# Altium PCB Flyback.PcbDoc (part 2 of 2)
Units mm, origin at the board's own origin, x right, y up, seen from the top; angles counter-clockwise.
Board outline 152.4 x 101.6 mm, 2 copper layers (Top Layer, Bottom Layer), stack 1.671 mm thick; 41 components, 28 nets, 118 pads, 0 vias.
Unrouted connection lines stored in the file: 75.
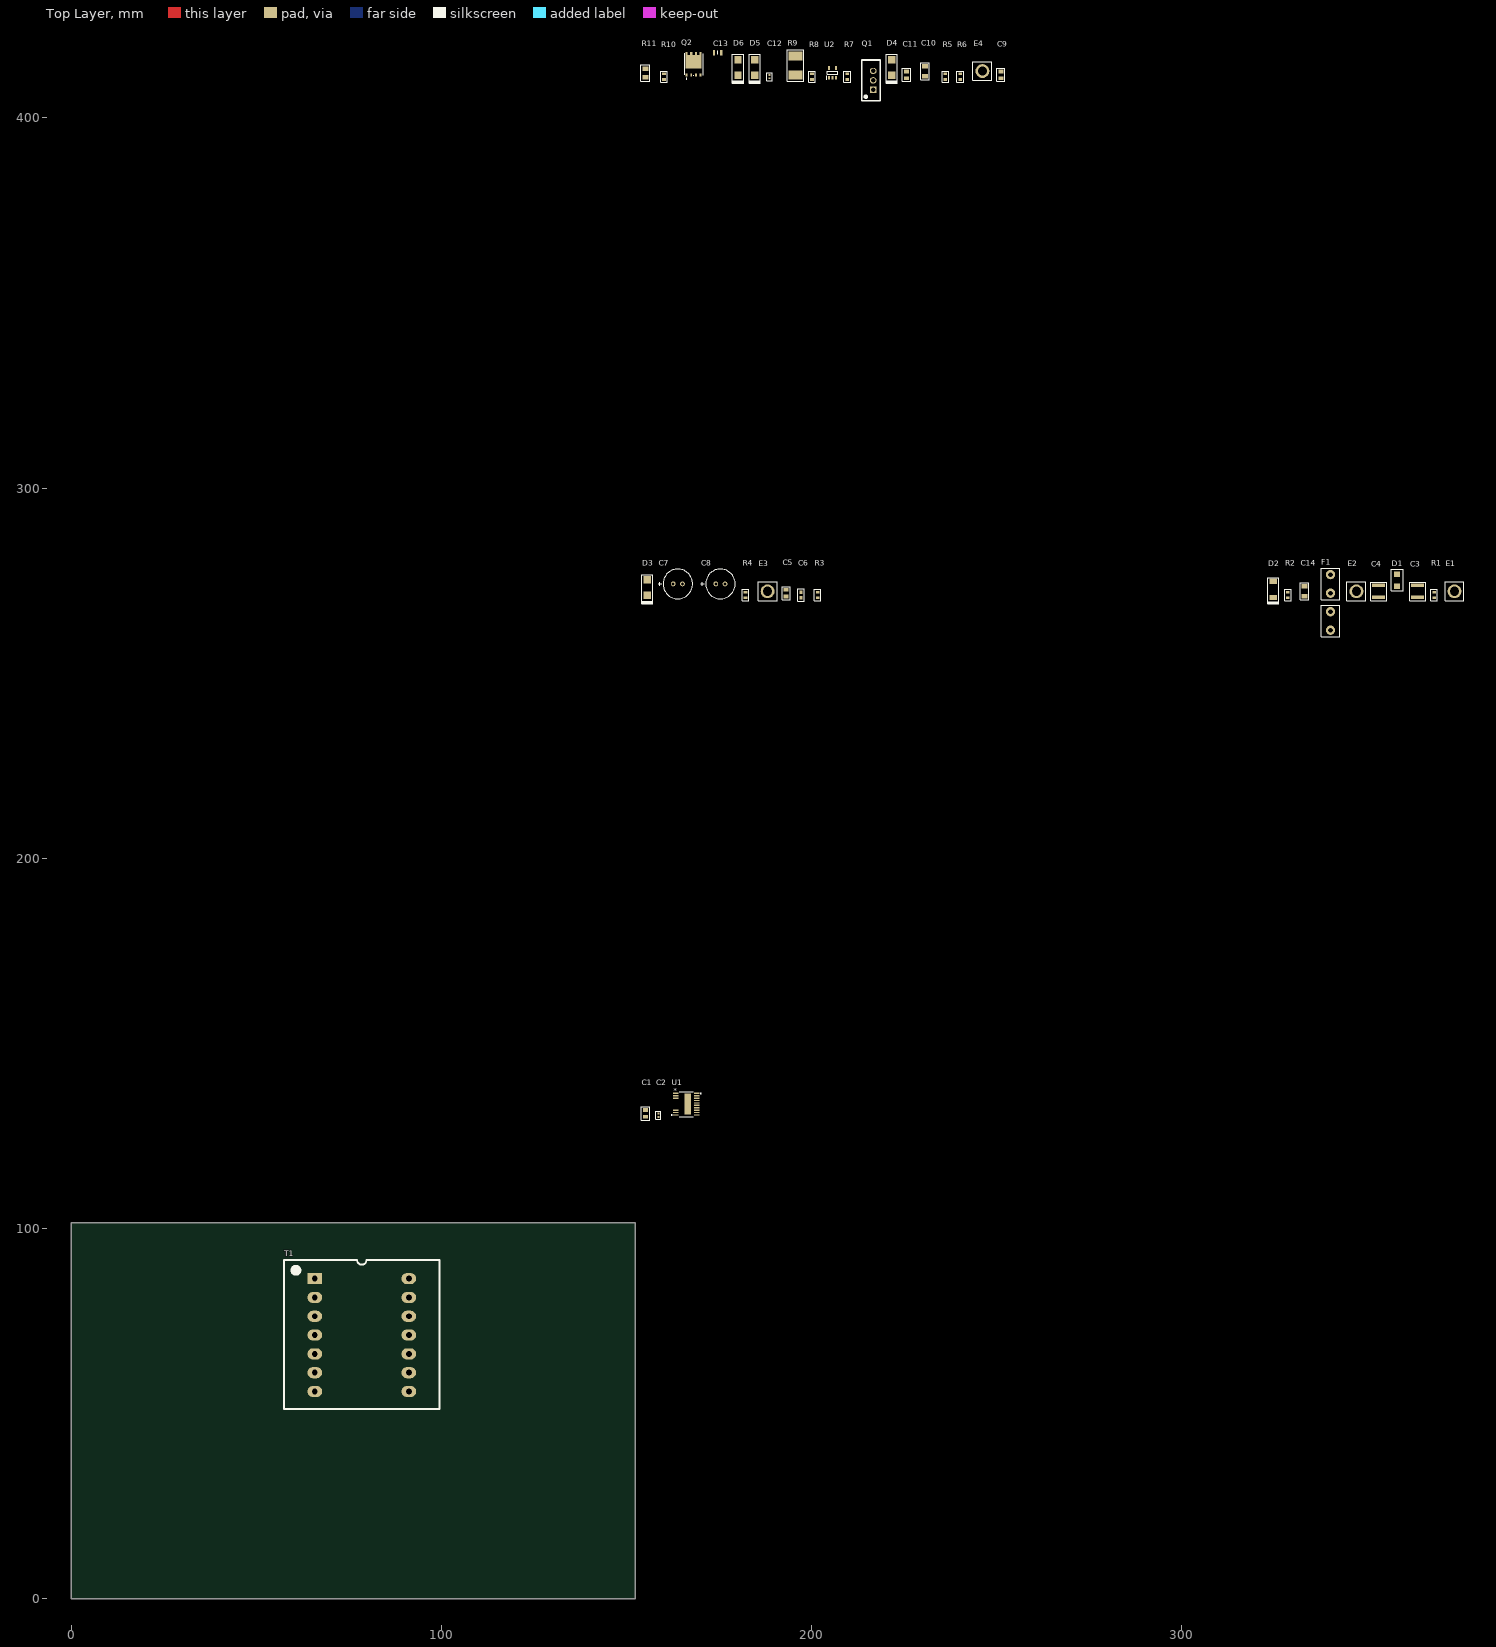
[diagram p0: Top Layer view]

## Part data (continued)
R5: library part R_Tc, "RES SMD 110K OHM 5% 1/10W 0603 / CRCW0603110KJNEA", Case Code (Imperial)=0603, Case Code (Metric)=1608, Manufacturer="Vishay Dale", Manufacturer Part Number=CRCW0603110KJNEA, Max Operating Temperature=155°C, Max Power Dissipation=100mW, Min Operating Temperature=-55°C, Package Quantity=1, Resistance=110kR, Resistor Type="Thick Film", Supplier Part Number 1=541-110KGCT-ND, Temperature Coefficient=200ppm/°C, Tolerance=5%, Voltage Rating=75V, Case/Package=0603, Category=Resistors, ComponentLink1Description=https://datasheet.ciiva.com/3256/dcrcwe3-3256965.pdf?src-supplier=Avnet, ComponentLink1URL=https://datasheet.ciiva.com/3256/dcrcwe3-3256965.pdf?src-supplier=Avnet, ComponentLink2Description=https://datasheet.ciiva.com/5549/dcrcwe3-109170-5549509.pdf?src-supplier=Mouser, ComponentLink2URL=https://datasheet.ciiva.com/5549/dcrcwe3-109170-5549509.pdf?src-supplier=Mouser, ComponentLink3Description=https://datasheet.ciiva.com/2493/dcrcwe3-2493661.pdf?src-supplier=Digi-Key, ComponentLink3URL=https://datasheet.ciiva.com/2493/dcrcwe3-2493661.pdf?src-supplier=Digi-Key, ComponentLink4Description=https://datasheet.ciiva.com/2493/dcrcwe3-2493662.pdf?src-supplier=Digi-Key, ComponentLink4URL=https://datasheet.ciiva.com/2493/dcrcwe3-2493662.pdf?src-supplier=Digi-Key, ComponentLink5Description=https://datasheet.ciiva.com/2493/dcrcwe3-2493663.pdf?src-supplier=Digi-Key, ComponentLink5URL=https://datasheet.ciiva.com/2493/dcrcwe3-2493663.pdf?src-supplier=Digi-Key, Construction=Rectangular, Contact Plating=Tin, Depth=0.85mm, Features="Automotive AEC-Q200", Height=0.02inch, Lead Free="Lead Free", Length=1.55mm, Military Standard=Not, Number of Terminations=2, Packaging="Tape and Reel", Power Rating=100mW, Pricing 1="1=0,10000, 10=0,03200, 100=0,01310, 1000=0,00588, 2500=0,00510 (USD)", Radiation Hardening=No, RoHS=Yes, RoHS Compliant=Yes, Series=CRCW, Stock 1=16475, Supplier 1=Digi-Key, Termination=SMD/SMT, Voltage Rating (DC)=75V, Weight=7.1E-05oz, Width=0.85mm
R6: library part R_FB2, "VISHAY         CRCW06035K36FKEA.             SMD Chip Resistor, Thick Film, 5.36 kohm, 75 V, 0603 [1608 Metric], 100 mW,  1%, CRCW Series", Case Code (Imperial)=0603, Case Code (Metric)=1608, Manufacturer=Vishay, Manufacturer Part Number=CRCW06035K36FKEA, Max Operating Temperature=155°C, Max Power Dissipation=100mW, Min Operating Temperature=-55°C, Package Quantity=5000, Resistance=5.36kR, Resistance Tolerance=1%, Resistor Type="Thick Film", Supplier Part Number 1=541-5.36KHCT-ND, Temperature Coefficient=100ppm/°C, Voltage Rating=75V, Case/Package=0603, Category=Resistors, ComponentLink1Description=https://datasheet.ciiva.com/3257/dcrcwe3-3257765.pdf?src-supplier=Avnet, ComponentLink1URL=https://datasheet.ciiva.com/3257/dcrcwe3-3257765.pdf?src-supplier=Avnet, ComponentLink2Description=https://datasheet.ciiva.com/7679/1697337-7679125.pdf?src-supplier=Element14, ComponentLink2URL=https://datasheet.ciiva.com/7679/1697337-7679125.pdf?src-supplier=Element14, ComponentLink3Description=https://datasheet.ciiva.com/7679/1697337-7679126.pdf?src-supplier=Element14, ComponentLink3URL=https://datasheet.ciiva.com/7679/1697337-7679126.pdf?src-supplier=Element14, ComponentLink4Description=https://datasheet.ciiva.com/16789/70201119-16789112.pdf?src-supplier=Allied+Electronics, ComponentLink4URL=https://datasheet.ciiva.com/16789/70201119-16789112.pdf?src-supplier=Allied+Electronics, ComponentLink5Description=https://datasheet.ciiva.com/7792/125364-7792346.pdf?src-supplier=Element14, ComponentLink5URL=https://datasheet.ciiva.com/7792/125364-7792346.pdf?src-supplier=Element14, ComponentLink6Description=https://datasheet.ciiva.com/22707/1697337-22707754.pdf?src-supplier=Element14, ComponentLink6URL=https://datasheet.ciiva.com/22707/1697337-22707754.pdf?src-supplier=Element14, ComponentLink7Description=https://datasheet.ciiva.com/5541/dcrcwe3-109170-5541375.pdf?src-supplier=Mouser, ComponentLink7URL=https://datasheet.ciiva.com/5541/dcrcwe3-109170-5541375.pdf?src-supplier=Mouser, Construction=Rectangular, Contact Plating=Tin, Depth=0.85mm, Features="Automotive AEC-Q200", Height=0.45mm, Lead Free="Lead Free", Length=1.55mm, Military Standard=Not, Number of Pins=2, Number of Terminations=2, Packaging="Tape and Reel", Power Rating=100mW, Pricing 1="1=0,10000, 10=0,03600, 100=0,01450, 1000=0,00652, 2500=0,00566 (USD)", Radiation Hardening=No, REACH SVHC="No SVHC", RoHS=Yes, RoHS Compliant=Yes, Series=CRCW, Size Code=0603, Stock 1=42, Supplier 1=Digi-Key, Technology="THICK FILM", Termination=SMD/SMT, Tolerance=1%, Voltage Rating (DC)=75V, Weight=7.1E-05oz, Width=0.85mm
R7: library part R_Gate2, "RES SMD 4.7 OHM 5% 1/10W 0603", Case Code (Imperial)=0603, Case Code (Metric)=1608, Manufacturer="Stackpole Electronics", Manufacturer Part Number=RMCF0603JT4R70, Max Operating Temperature=155°C, Max Power Dissipation=100mW, Min Operating Temperature=-55°C, Resistance=4.7R, Resistor Type="Thick Film", Supplier Part Number 1=RMCF0603JT4R70CT-ND, Temperature Coefficient=200ppm/°C, Tolerance=5%, Case/Package=0603, Category="Chip SMD Resistors", ComponentLink1Description=http://components.arrow.com/part/dataview/50500623S9982757N1174?src-supplier=Arrow+Electronics, ComponentLink1URL=http://components.arrow.com/part/dataview/50500623S9982757N1174?src-supplier=Arrow+Electronics, ComponentLink2Description=https://www.seielect.com/catalog/SEI-RMCF_RMCP.pdf?src-supplier=Avnet, ComponentLink2URL=https://www.seielect.com/catalog/SEI-RMCF_RMCP.pdf?src-supplier=Avnet, ComponentLink3Description=https://www.seielect.com/Catalog/SEI-RMCF_RMCP.pdf?src-supplier=Digi-Key, ComponentLink3URL=https://www.seielect.com/Catalog/SEI-RMCF_RMCP.pdf?src-supplier=Digi-Key, ComponentLink4Description=http://www.seielect.com/Catalog/SEI-RMC.pdf?src-supplier=Future+Electronics, ComponentLink4URL=http://www.seielect.com/Catalog/SEI-RMC.pdf?src-supplier=Future+Electronics, ComponentLink5Description=https://www.seielect.com/catalog/SEI-Packaging.pdf?src-supplier=Digi-Key, ComponentLink5URL=https://www.seielect.com/catalog/SEI-Packaging.pdf?src-supplier=Digi-Key, Contact Plating=Tin,Matte, Features="Automotive AEC-Q200", Height=0.022inch, Lead Free="Lead Free", Length=0.061inch, Mount="Surface Mount", Number of Terminations=2, Packaging="Tape and Reel", Power Rating=100mW, Pricing 1="1=0,10000, 10=0,02200, 100=0,00880, 1000=0,00396, 2500=0,00344 (USD)", Radiation Hardening=No, RoHS=Yes, RoHS Compliant=Yes, Series=RMCF, Size Code=0603, Stock 1=483, Supplier 1=Digi-Key, Width=0.031inch
R8: library part R_Drain2, "RES SMD 2.32K OHM 1% 1/10W 0603", Case Code (Imperial)=0603, Case Code (Metric)=1608, Manufacturer="Stackpole Electronics", Manufacturer Part Number=RMCF0603FT2K32, Max Operating Temperature=155°C, Max Power Dissipation=100mW, Min Operating Temperature=-55°C, Resistance=2.32kR, Resistor Type="Thick Film", Supplier Part Number 1=RMCF0603FT2K32CT-ND, Temperature Coefficient=100ppm/°C, Tolerance=1%, Case/Package=0603, Category="Chip SMD Resistors", ComponentLink1Description=https://www.seielect.com/Catalog/SEI-RMCF_RMCP.pdf?src-supplier=Digi-Key, ComponentLink1URL=https://www.seielect.com/Catalog/SEI-RMCF_RMCP.pdf?src-supplier=Digi-Key, ComponentLink2Description=https://www.seielect.com/catalog/SEI-RMCF_RMCP.pdf?src-supplier=Avnet, ComponentLink2URL=https://www.seielect.com/catalog/SEI-RMCF_RMCP.pdf?src-supplier=Avnet, Contact Plating=Tin,Matte, Features="Automotive AEC-Q200", Height=0.022inch, Lead Free="Lead Free", Length=0.061inch, Mount="Surface Mount", Number of Terminations=2, Packaging="Tape and Reel", Pricing 1="1=0,10000, 10=0,01700, 100=0,00680, 1000=0,00305, 2500=0,00264 (USD)", Radiation Hardening=No, RoHS=Yes, RoHS Compliant=Yes, Series=RMCF, Stock 1=22121, Supplier 1=Digi-Key, Width=0.031inch
R9: library part R_Snubber_Pri, "Res Thick Film 2512 499 Ohm 1% 2W ±100ppm/°C Molded SMD SMD Paper T/R / CRM2512-FX-4990ELF", Case/Package=2512, Manufacturer=Bourns, Manufacturer Part Number=CRM2512-FX-4990ELF, Max Operating Temperature=155°C, Max Power Dissipation=2W, Min Operating Temperature=-55°C, Package Quantity=4000, Resistance=499R, Resistor Type="Thick Film", Supplier Part Number 1=118-CRM2512-FX-4990ELFCT-ND, Temperature Coefficient=100ppm/°C, Tolerance=1%, Category="Chip SMD Resistors", ComponentLink1Description=https://datasheet.ciiva.com/9119/crm-9119624.pdf?src-supplier=Avnet, ComponentLink1URL=https://datasheet.ciiva.com/9119/crm-9119624.pdf?src-supplier=Avnet, ComponentLink2Description=https://datasheet.ciiva.com/29521/crm-29521785.pdf?src-supplier=Digi-Key, ComponentLink2URL=https://datasheet.ciiva.com/29521/crm-29521785.pdf?src-supplier=Digi-Key, ComponentLink3Description=https://datasheet.ciiva.com/16929/crm-16929438.pdf?src-supplier=Avnet+Europe, ComponentLink3URL=https://datasheet.ciiva.com/16929/crm-16929438.pdf?src-supplier=Avnet+Europe, Height=0.031inch, Length=0.248inch, Number of Terminations=2, Packaging="Tape and Reel", Power Rating=2W, Pricing 1="1=0,63000, 10=0,44800, 100=0,23320, 1000=0,12558 (USD)", RoHS=Yes, Stock 1=10792, Supplier 1=Digi-Key, Width=0.122inch
R10: library part R_Snubber_Sec, "Vishay CRCW Series Thick Film Power Resistor 0603 Case 49.9 1% 0.25W 100ppm/K / CRCW060349R9FKEAHP", Case Code (Imperial)=0603, Case Code (Metric)=1608, Manufacturer="Vishay Dale", Manufacturer Part Number=CRCW060349R9FKEAHP, Max Operating Temperature=155°C, Max Power Dissipation=250mW, Min Operating Temperature=-55°C, Package Quantity=10, Resistance=49.9R, Resistor Type="Thick Film", Supplier Part Number 1=541-49.9SCT-ND, Temperature Coefficient=100ppm/°C, Tolerance=1%, Voltage Rating=75V, Case/Package=0603, Category="Chip SMD Resistors", ComponentLink1Description=https://datasheet.ciiva.com/9003/crcwhpe3-9003461.pdf?src-supplier=Avnet, ComponentLink1URL=https://datasheet.ciiva.com/9003/crcwhpe3-9003461.pdf?src-supplier=Avnet, ComponentLink2Description=https://datasheet.ciiva.com/2578/crcwhpe3-2578506.pdf?src-supplier=Digi-Key, ComponentLink2URL=https://datasheet.ciiva.com/2578/crcwhpe3-2578506.pdf?src-supplier=Digi-Key, ComponentLink3Description=https://datasheet.ciiva.com/2578/crcwhpe3-2578507.pdf?src-supplier=Digi-Key, ComponentLink3URL=https://datasheet.ciiva.com/2578/crcwhpe3-2578507.pdf?src-supplier=Digi-Key, ComponentLink4Description=https://datasheet.ciiva.com/2578/crcwhpe3-2578508.pdf?src-supplier=Digi-Key, ComponentLink4URL=https://datasheet.ciiva.com/2578/crcwhpe3-2578508.pdf?src-supplier=Digi-Key, ComponentLink5Description=https://datasheet.ciiva.com/48525/crcwhpe3-48525900.pdf?src-supplier=Avnet, ComponentLink5URL=https://datasheet.ciiva.com/48525/crcwhpe3-48525900.pdf?src-supplier=Avnet, ComponentLink6Description=https://datasheet.ciiva.com/5547/crcwhpe3-46056-5547183.pdf?src-supplier=Mouser, ComponentLink6URL=https://datasheet.ciiva.com/5547/crcwhpe3-46056-5547183.pdf?src-supplier=Mouser, Construction=Rectangular, Contact Plating=Tin, Depth=0.85mm, Features="Automotive AEC-Q200", Height=0.45mm, Lead Free="Lead Free", Length=1.6mm, Military Standard=Not, Mount="Surface Mount", Number of Terminations=2, Packaging="Tape and Reel", Power Rating=250mW, Pricing 1="1=0,17000, 10=0,14800, 100=0,05790, 1000=0,02422, 2500=0,02220 (USD)", Radiation Hardening=No, RoHS=Yes, RoHS Compliant=Yes, Series=CRCW-HP, Stock 1=174736, Supplier 1=Digi-Key, Technology="THICK FILM", Termination=SMD/SMT, Weight=7.1E-05oz, Width=0.033inch
R11: library part R_Sense, "TR / Current Sensors, 0805 0.25W, 5% / RL1220T-R020-J", Case Code (Imperial)=0805, Case Code (Metric)=2012, Manufacturer=Susumu, Manufacturer Part Number=RL1220T-R020-J, Max Operating Temperature=125°C, Max Power Dissipation=250mW, Min Operating Temperature=-55°C, Package Quantity=1, Resistance=20mR, Resistor Type="Thin Film", Supplier Part Number 1=RL12T.020JCT-ND, Temperature Coefficient=350ppm/°C, Tolerance=5%, Voltage Rating (DC)=100V, Case/Package=0805, Category=Resistors, ComponentLink1Description=https://datasheet.ciiva.com/2488/rl-data-sheet-2488002.pdf?src-supplier=Digi-Key, ComponentLink1URL=https://datasheet.ciiva.com/2488/rl-data-sheet-2488002.pdf?src-supplier=Digi-Key, ComponentLink2Description=https://datasheet.ciiva.com/2488/rl-data-sheet-2488003.pdf?src-supplier=Digi-Key, ComponentLink2URL=https://datasheet.ciiva.com/2488/rl-data-sheet-2488003.pdf?src-supplier=Digi-Key, ComponentLink3Description=https://datasheet.ciiva.com/2488/rl-data-sheet-2488004.pdf?src-supplier=Digi-Key, ComponentLink3URL=https://datasheet.ciiva.com/2488/rl-data-sheet-2488004.pdf?src-supplier=Digi-Key, ComponentLink4Description=https://datasheet.ciiva.com/12915/e-15-16-12915302.pdf?src-supplier=Mouser, ComponentLink4URL=https://datasheet.ciiva.com/12915/e-15-16-12915302.pdf?src-supplier=Mouser, Height=0.028inch, Lead Free="Lead Free", Length=0.079inch, Number of Terminations=2, Packaging="Tape and Reel", Power Rating=250mW, Pricing 1="1=0,35000, 10=0,30000, 25=0,21840, 50=0,15840, 100=0,11740, 250=0,09008, 500=0,07098, 1000=0,04914 (USD)", RoHS=Yes, RoHS Compliant=Yes, Series=RL, Stock 1=301682, Supplier 1=Digi-Key, Technology="THIN FILM", Termination=SMD/SMT, Weight=0.000194oz, Width=0.049inch
T1: library part Transformer_CoilFormer, "Epcos B66362W1014T001 ETD 34 Coil Former, 14 Pins / B66362W1014T001", Manufacturer="TDK EPCOS", Manufacturer Part Number=B66362W1014T001, Max Operating Temperature=180°C, Package Quantity=100, Supplier Part Number 1=495-5465-ND, Category="Coil Former", ComponentLink1Description=https://datasheet.ciiva.com/48906/70419804-48906870.pdf?src-supplier=Allied+Electronics, ComponentLink1URL=https://datasheet.ciiva.com/48906/70419804-48906870.pdf?src-supplier=Allied+Electronics, Inside Diameter=20.9mm, Material=Polyterephthalate, Number of Pins=14, Outside Diameter=25.4mm, Packaging=Bulk, Pricing 1="1=1,99000, 10=1,71200, 25=1,30080, 50=1,23240, 100=1,09550, 250=1,02704, 500=0,95858, 1000=0,91065 (USD)", RoHS=Yes, Supplier 1=Digi-Key, Termination=Pin, Weight=1.410958oz
U1: "DC/DC Cntrlr Single-OUT 142kHz Automotive 16-Pin TSSOP EP Tube", Manufacturer="Analog Devices / Linear Technology", Manufacturer Part Number=LT8316EFE#PBF, Supplier Part Number 1=LT8316EFE#PBF-ND, Pricing 1="1=5,81000, 10=5,22200, 25=4,93680, 100=4,27870, 250=4,05928, 500=3,64238, 1000=3,10500 (USD)", RoHS=Yes, Supplier 1=Digi-Key
U2: library part U_LT8309ES5#TRMPBF, "IC REG FLYBACK ISO ADJ TSOT23-5", Case/Package=SOT-23-5, Manufacturer="Analog Devices / Linear Technology", Manufacturer Part Number=LT8309ES5#TRMPBF, Max Operating Temperature=125°C, Max Supply Voltage=40V, Min Operating Temperature=-40°C, Min Supply Voltage=4.5V, Operating Supply Current=300uA, Supplier Part Number 1=LT8309ES5#TRMPBFCT-ND, Category="Voltage Regulators - Switching", ComponentLink1Description=https://datasheet.ciiva.com/29589/44473-29589472.pdf?src-supplier=Digi-Key, ComponentLink1URL=https://datasheet.ciiva.com/29589/44473-29589472.pdf?src-supplier=Digi-Key, ComponentLink2Description=https://datasheet.ciiva.com/29589/44473-29589470.pdf?src-supplier=Digi-Key, ComponentLink2URL=https://datasheet.ciiva.com/29589/44473-29589470.pdf?src-supplier=Digi-Key, ComponentLink3Description=https://datasheet.ciiva.com/29589/44473-29589471.pdf?src-supplier=Digi-Key, ComponentLink3URL=https://datasheet.ciiva.com/29589/44473-29589471.pdf?src-supplier=Digi-Key, Mount="Surface Mount", Number of Pins=5, Packaging="Cut Tape", Pricing 1="1=4,92000, 10=4,41500, 25=4,17360, 100=3,61720, 250=3,43176 (USD)", REACH SVHC="No SVHC", RoHS=Yes, Supplier 1=Digi-Key

## Nets (pads, with @x,y where several pads share a name; then routed paths per layer and width w, separated by ;. In a path a pad name is that pad's centre, name@x,y a point inside that pad or via, vN(x,y) a via of type N, cw(c..) or ccw(c..) an arc to the next point about the centre after c; other vN are vias at no path point)
AGND: C1.1 C5.1 R1.1 R2.1 R6.1 T1.3 U1.16
BIAS: C5.2 D2.1 U1.9
DCM: R4.1 U1.10
FB: R3.1 R5.2 R6.2 U1.12
GATE: Q1.1 U1.19
GND: U1.15 U1.20
INTVCC: C1.2 U1.8 U1.17
IREG//SS: R2.2 U1.14
NetC6_1: C6.1 R4.2
NetC6_2: C6.2 D2.2 R3.2 T1.1
NetC7_1: C7.1 C8.1 C9.2 C11.2 E3.1 T1.14 U2.4
NetC10_1: C10.1 R9.2
NetC10_2: C10.2 D6.2 Q1.2 T1.7
NetC12_1: C12.1 D5.1 Q2.2 R8.1 T1.11
NetC12_2: C12.2 R10.1
NetC13_2: C13.2 U2.3
NetD3_1: D3.1 D4.2
NetD4_1: D4.1 D6.1
NetE2_1: E2.1 F1.1
NetR7_1: R7.1 U2.1
NetR8_2: R8.2 U2.5
PGND: C3.1 C4.1 C14.1 F1.2 R11.1
S_GATE: Q2.1 R7.2
SENSE: Q1.3 R9.1 R11.2 U1.18
SGND: C7.2 C8.2 C9.1 C11.1 C13.1 C14.2 D5.2 E4.1 Q2.3 R10.2 U2.2
TC: R5.1 U1.11
VC: C2.2 U1.13
VIN: C3.2 C4.2 D3.2 E1.1 T1.5 U1.1 U1.2 U1.3
pads on no net: C2.1 D1.1 D1.2 R1.2 T1.2 T1.4 T1.6 T1.8 T1.12 U1.EPAD

## Text inside footprints (layer, text, board x,y; h text height)
U1: Top Overlay "*" at 162.703,136.748 h1.27; Mechanical 13 "*" at 163.963,135.503 h1.27